# Allegro board COULOMETER_BOARD_V1.0.brd
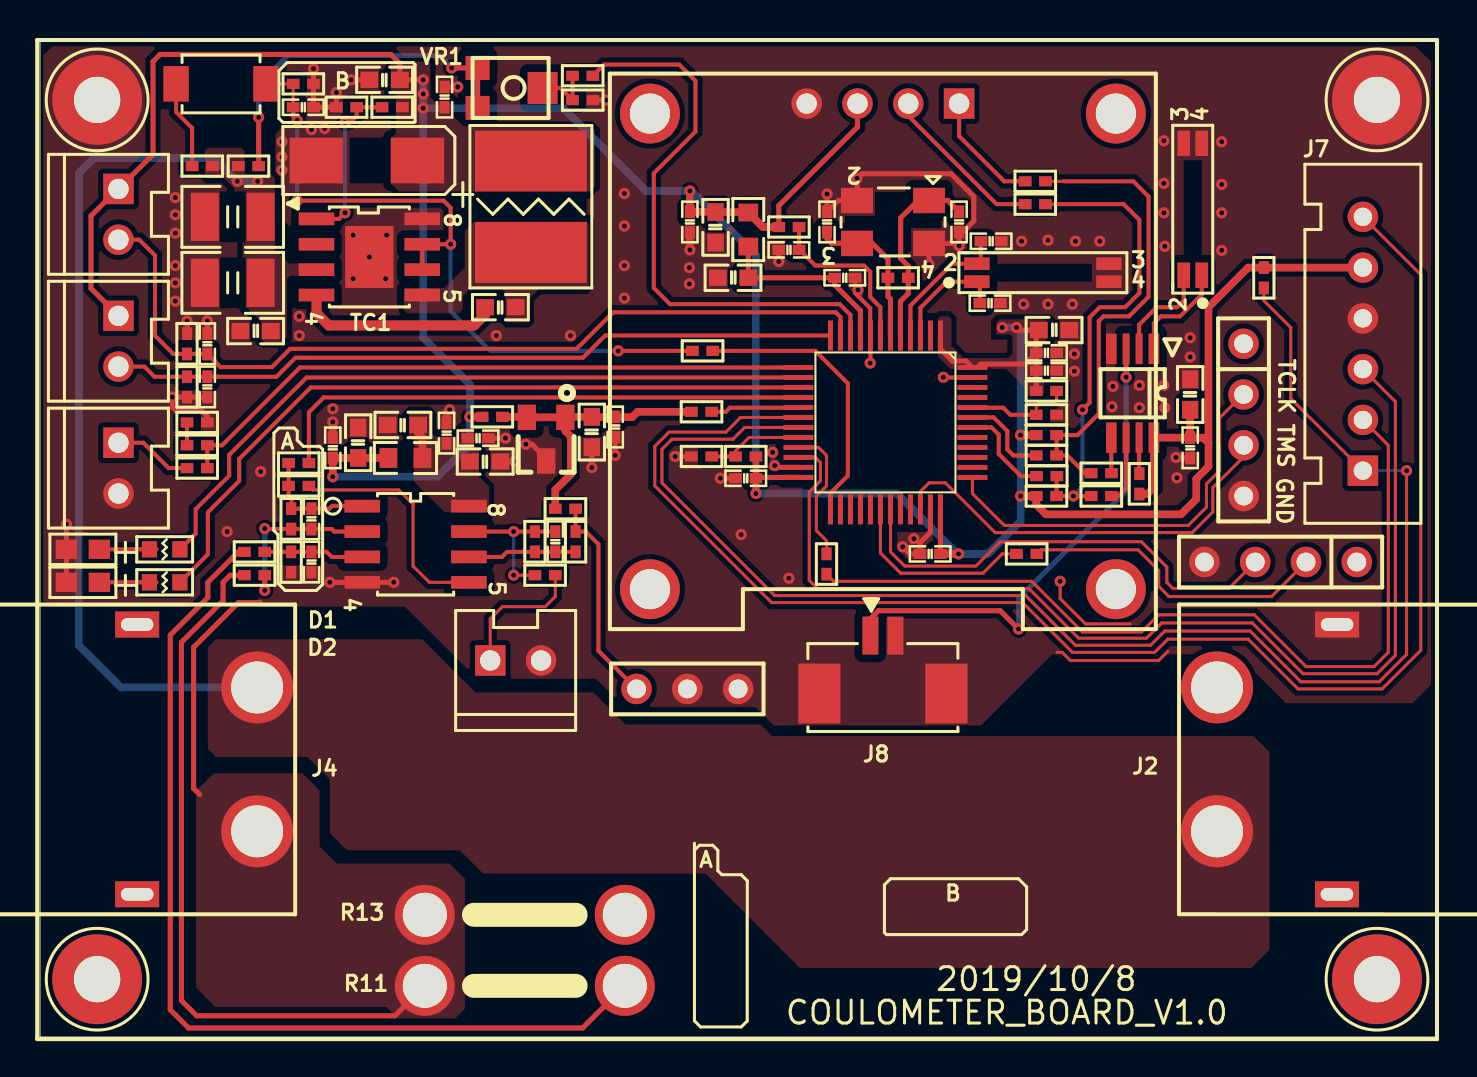
[diagram p0: board, top side]
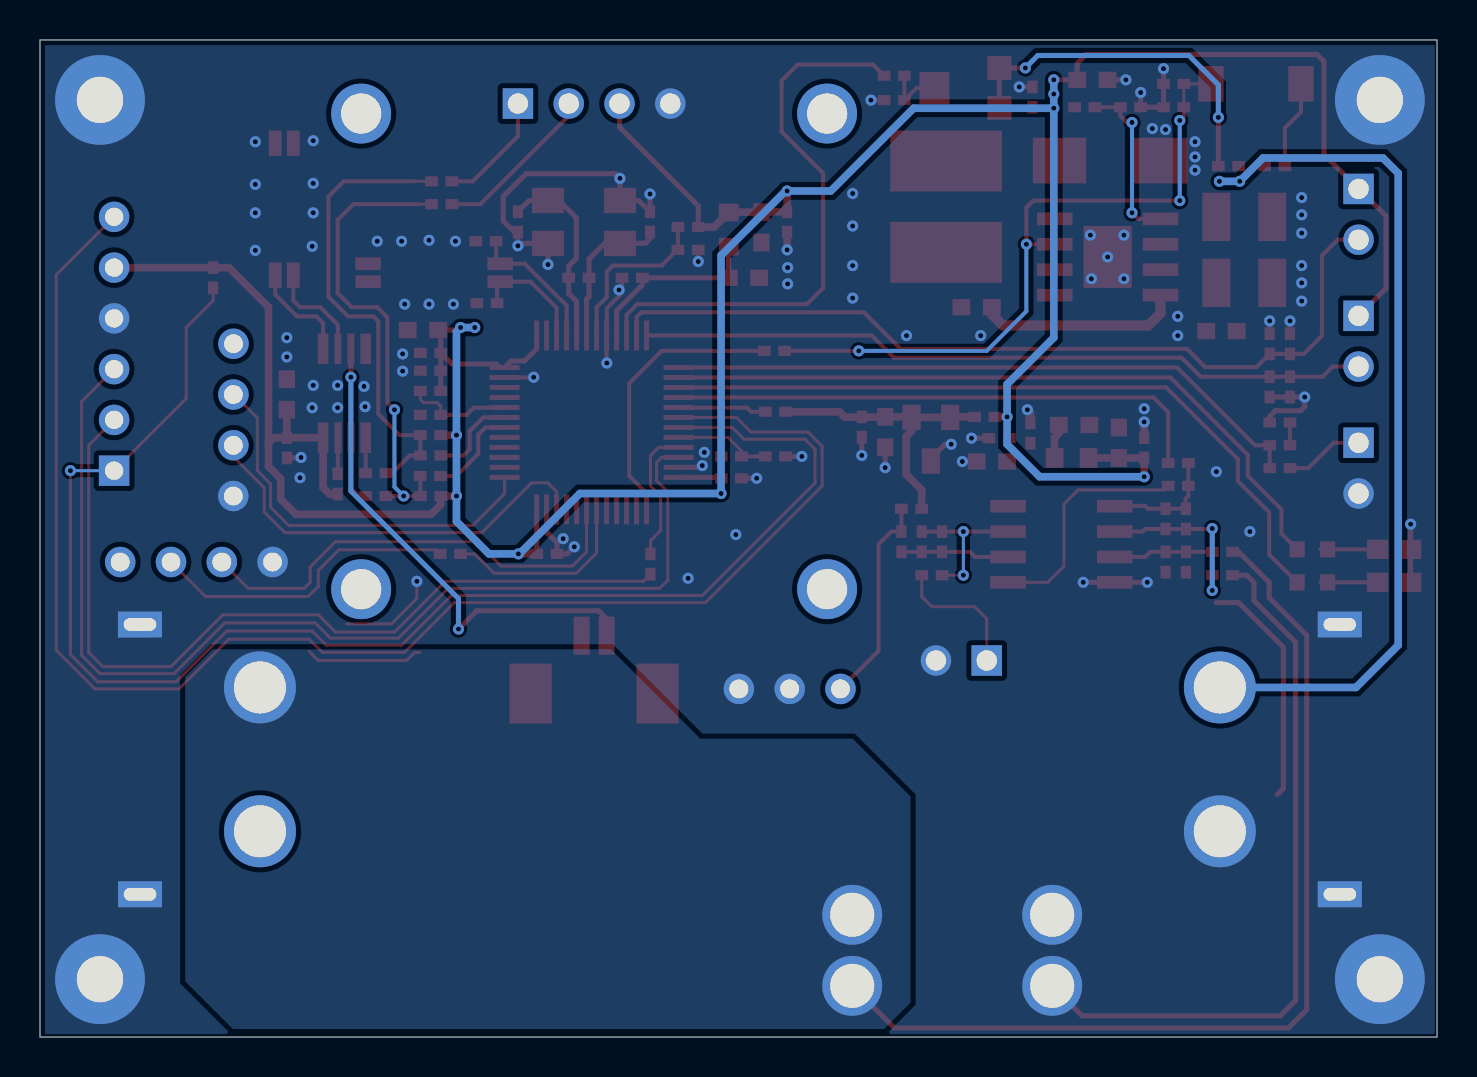
[diagram p1: board, bottom side, seen from below]

Outline 69.86 x 49.89 mm; copper layers: TOP, BOTTOM. Coordinates in mm from the lower left corner of the outline.
Outline path: 0,49.89 69.86,49.89 69.86,0 0,0 0,49.89

## Design rules (mm)
constraint set DEFAULT: min track width 0.152

## Placement (name value [footprint] x y rotation side)
C1  0.1uF/16V  [C0402]  37.45 39.39 180 top
C2  0.1uF/16V  [C0402]  28.76 30.53 90 top
C3  10uF/10V  [C0603]  27.6 30.27 270 top
C4  18pF/50V  [C0402]  39.36 40.79 270 top
C5  18pF/50V  [C0402]  45.96 40.79 90 top
C6  18pF/50V_NC  [C0402]  47.56 39.82 180 top
C7  18pF/50V_NC  [C0402]  47.51 36.72 180 top
C8  10uF/10V  [C0603]  22.26 28.8 0 top
C9  0.1uF/16V  [C0402]  21.91 29.97 0 top
C10  1nF/50V_NC  [C0402]  13.57 25.93 90 top
C11  0.1uF/16V  [C0402]  32.5 40.79 270 top
C12  10uF/10V  [C0603]  33.78 40.52 270 top
C13  0.1uF/16V  [C0402]  40.24 37.99 0 top
C14  10uF/10V  [C0603]  34.66 37.99 180 top
C15  10uF/10V  [C0603]  50.71 35.38 180 top
C16  0.1uF/16V  [C0402]  44.51 24.18 180 top
C17  0.1uF/16V  [C0402]  50.33 34.23 0 top
C18  0.1uF/16V  [C0402]  50.33 33.35 0 top
C19  0.1uF/16V  [C0402]  35.29 27.96 180 top
C20  1nF/50V_NC  [C0402]  25.77 24.79 90 top
C21  2.2uF/100V  [C1210]  9.64 41.04 0 top
C22  2.2uF/100V  [C1210]  9.64 37.74 0 top
C23  0.1uF/100V  [C0603]  10.78 35.33 180 top
C24  0.1uF/100V  [C0603]  23.02 36.52 0 top
C25  0.1uF/16V  [C0402]  14.64 29.49 90 top
C26  0.1uF/16V  [C0402]  20.33 30.22 90 top
C27  10uF/10V  [C0603]  15.91 29.74 270 top
C28  10uF/10V  [C0603]  17.23 47.9 0 top
C29  0.1uF/16V  [C0402]  20.23 47.04 90 top
C30  10uF/10V  [C0603]  18.15 30.63 0 top
C31  10uF/10V  [C0603]  57.52 32.15 270 top
C32  0.1uF/16V  [C0402]  57.52 29.49 270 top
C33  0.1uF/16V  [C0402]  8.37 34.69 90 top
C34  0.1uF/16V  [C0402]  8.37 32.53 270 top
C35  0.1uF/16V  [C0402]  13.17 46.53 0 top
C36  1nF/50V_NC  [C0402]  13.57 23.77 90 top
D1  Green  [D0603]  2.14 24.41 270 top
D2  Green  [D0603]  2.14 22.75 270 top
FB1  BLM18PG221SN1  [L0603]  35.42 40.41 270 top
FB2  BLM18PG221SN1  [L0603]  18.27 28.98 0 top
J1  SIP4-100_180D_NC  [SIP_4P_100_42]  60.18 34.69 270.1 top
J2  -  [XT60PW]  61.86 13.89 270 top
J3  SIP4-100_180D_NC  [SIP_4P_100_42]  65.85 23.77 180 top
J4  -  [XT60PW]  7.86 13.89 90 top
J5  SIP_2P_NC  [SIP2-100]  23.79 18.84 0 top
J7  SIP_6P  [SIP6-100]  66.15 28.34 90 top
J8  -  [SMT_2PIN_1_25MM_180]  42.15 20.09 0 top
J9  SIP_2P_NC  [SIP2-100]  3.92 28.47 270 top
J10  SIP_2P_NC  [SIP2-100]  3.92 41.17 270 top
J11  SIP_2P_NC  [SIP2-100]  3.92 34.82 270 top
L1  33uH/1A  [PL0707]  24.55 41.55 90 top
MH1  M2-3  [M2-3_4-5]  2.86 2.89 0 top
MH2  M2-3  [M2-3_4-5]  66.86 2.89 0 top
MH3  M2-3  [M2-3_4-5]  66.86 46.89 0 top
MH4  M2-3  [M2-3_4-5]  2.86 46.89 0 top
OLED1  -  [OLED_SIP4-100]  42.15 34.31 0 top
R1  1K_1%  [R0402]  50.33 31.14 0 top
R2  4.7K_5%  [R0402]  50.33 30.12 180 top
R3  4.7K_5%  [R0402]  50.33 27.07 180 top
R4  1K_1%_NC  [R0402]  50.33 32.33 180 top
R5  4.7K_5%  [R0402]  37.45 40.53 0 top
R6  1K_1%  [R0402]  22.62 31.03 0 top
R7  1K_1%_NC  [R0402]  35.29 29.05 0 top
R8  1K_1%  [R0402]  33.08 29.05 180 top
R9  1M_5%  [R0402]  42.91 37.99 180 top
R10  22R_5%  [R0402]  50.34 28.07 180 top
R11  5mR_1%  [R_2X10MM]  24.24 2.56 180 top
R12  22R_5%  [R0402]  50.33 29.1 0 top
R13  5mR_1%  [R_2X10MM]  24.24 6.12 180 top
R14  187K_1%  [R0402]  10.43 43.58 0 top
R15  1K_1%  [R0402]  10.73 24.28 180 top
R16  1K_1%  [R0402]  12.94 28.72 180 top
R17  1K_1%  [R0402]  12.94 27.58 180 top
R18  22R_5%  [R0402]  49.34 24.18 0 top
R19  10K_1%  [R0402]  12.56 25.93 270 top
R20  1K_1%  [R0402]  33.08 31.29 0 top
R21  1K_1%  [R0402]  27.14 48.1 0 top
R22  1K_1%  [R0402]  10.73 23.11 0 top
R23  10K_1%  [R0402]  27.14 46.88 0 top
R24  10K_1%  [R0402]  26.27 26.44 0 top
R25  1K_1%  [R0402]  25.26 23.11 180 top
R26  1K_1%  [R0402]  26.78 24.79 90 top
R27  330R_1%  [R0603]  6.23 24.41 0 top
R28  330R_1%  [R0603]  6.23 22.75 0 top
R29  22R_5%  [R0402]  39.33 23.67 270 top
R30  100K_1%  [R0402]  24.75 24.79 270 top
R31  100K_1%  [R0402]  8.11 43.58 180 top
R32  22R_5%  [R0402]  49.77 42.82 0 top
R33  22R_5%  [R0402]  49.77 41.68 0 top
R34  4.7K_5%  [R0402]  13.17 47.7 0 top
R35  154K_1%  [R0402]  17.61 46.53 0 top
R36  10K_1%  [R0402]  15.33 46.53 180 top
R37  10K_1%  [R0402]  54.98 27.68 270 top
R38  22R_5%  [R0402]  53.07 27.07 180 top
R39  22R_5%  [R0402]  53.07 28.22 180 top
R40  10K_1%  [R0402]  61.2 37.99 90 top
R41  1K_1%  [R0402]  7.86 29.61 180 top
R42  1K_1%  [R0402]  7.86 28.47 0 top
R43  1K_1%  [R0402]  7.86 30.76 0 top
R44  10K_1%  [R0402]  7.35 34.69 270 top
R45  10K_1%  [R0402]  7.35 32.53 90 top
R46  22R_5%  [R0402]  33.13 34.34 180 top
R47  10K_1%  [R0402]  12.56 23.77 270 top
SW1  -  [KEY-2-180]  9.05 47.7 180 top
TC1  100uF/10V  [SMD_C6-3]  16.34 43.86 180 top
U1  TL431ACDBZR  [SOT23-BEC]  25.31 29.92 180 top
U2  STM32F103C8T6  [LQFP48]  42.28 30.76 180 top
U3  LM358  [SOP8-50-150]  18.78 24.66 270 top
U4  MP9485  [HSOP-8-PAD]  16.47 39.04 270 top
U5  DS1339A  [SOP8-26-118]  55.61 34.44 180 top
VR1  10K_VR  [VR_3X3]  23.68 47.49 270 top
VR2  3590S-2_10K_NC  [SIP_3P_100_42]  29.83 17.42 0 top
Y1  8MHz  [X4-0503]  42.66 40.79 180 top
Y2  32.768KHZ  [XCOL-SMD]  50.15 38.25 0 top
Y3  32.768KHZ  [XCOL-SMD]  57.64 41.42 90 top

## Library data of the parts
C1 C11 C13 = CAP
C2 C9 C10 C20 C36 = CAP NP_8
C3 C8 C12 C14 C15 C21 C22 C27 C28 C30 C31 = 0_2.1uF Chip Cap
C4-C7 = CAP NP_3
C16-C19 C23-C26 C29 C32-C35 = CAP NP
D1 D2 = LED Green/TH
FB1 FB2 = FERRITE CHIP
J1 J3 = CONN PWR 4-R_0
J2 J4 = CONN PWR 4-R_3
J5 J9-J11 = SIP_1
J7 = SIP_0
J8 = SMT_2PIN_0-8MM
L1 = INDUCTOR_0
MH1-MH4 = M2-7
OLED1 = CONN PWR 4-R_5
R1 R4 R7 R8 R20 R21 VR1 VR2 = R_4
R2 R3 R5 R10-R17 R19 R22-R28 R30-R45 R47 = R_2
R6 R9 R18 R29 R46 = R
SW1 = KEY-2PIN_0
TC1 = CAP P_0
U1 = LED Green/TH_0
U2 = STM32F103C8T6
U3 = NE5532
U4 = TPS63700_2
U5 = DS1339_0
Y1 = CRYSTAL 4-PIN_1
Y2 Y3 = CRYSTAL_SMD3_0

## Footprints (pads in the part's own frame, mm; a bottom-side part is the same pattern mirrored in y, then rotated)
C0402
  rect 0.635x0.508 smd: 1(-0.508,0) 2(0.508,0)
C0603
  rect 0.889x0.813 smd: 1(-0.762,0) 2(0.762,0)
C1210
  rect 1.397x2.413 smd: 1(-1.397,0) 2(1.397,0)
D0603
  rect 0.965x1.067 smd: 1(0,0.826) 2(0,-0.826)
HSOP-8-PAD
  rect 0.635x1.778 smd: 1(-1.905,-2.644) 2(-0.635,-2.644) 3(0.635,-2.644) 4(1.905,-2.644) 5(1.905,2.644) 6(0.635,2.644) 7(-0.635,2.644) 8(-1.905,2.644)
  rect 3.099x2.413 smd: 9(0,0)
KEY-2-180
  rect 1.27x1.778 smd: 1(-2.25,0) 2(2.25,0)
L0603
  rect 0.889x0.991 smd: 1(-0.851,0) 2(0.851,0)
LQFP48
  rect 0.25x1.5 smd: 1(-2.75,-4.35) 2(-2.25,-4.35) 3(-1.75,-4.35) 4(-1.25,-4.35) 5(-0.75,-4.35) 6(-0.25,-4.35) 7(0.25,-4.35) 8(0.75,-4.35) 9(1.25,-4.35) 10(1.75,-4.35) 11(2.25,-4.35) 12(2.75,-4.35) 25(2.75,4.35) 26(2.25,4.35) 27(1.75,4.35) 28(1.25,4.35) 29(0.75,4.35) 30(0.25,4.35) 31(-0.25,4.35) 32(-0.75,4.35) 33(-1.25,4.35) 34(-1.75,4.35) 35(-2.25,4.35) 36(-2.75,4.35)
  rect 1.5x0.25 smd: 13(4.35,-2.75) 14(4.35,-2.25) 15(4.35,-1.75) 16(4.35,-1.25) 17(4.35,-0.75) 18(4.35,-0.25) 19(4.35,0.25) 20(4.35,0.75) 21(4.35,1.25) 22(4.35,1.75) 23(4.35,2.25) 24(4.35,2.75) 37(-4.35,2.75) 38(-4.35,2.25) 39(-4.35,1.75) 40(-4.35,1.25) 41(-4.35,0.75) 42(-4.35,0.25) 43(-4.35,-0.25) 44(-4.35,-0.75) 45(-4.35,-1.25) 46(-4.35,-1.75) 47(-4.35,-2.25) 48(-4.35,-2.75)
M2-3_4-5
  round 4.496 hole 2.311: 1(0,0)
OLED_SIP4-100
  round 2.997 hole 2.007: (-11.65,11.9) (-11.65,-11.9) (11.65,11.9) (11.65,-11.9)
  round 1.524 hole 1.016: 1(-3.81,12.4) 2(-1.27,12.4) 3(1.27,12.4)
  rect 1.524x1.524 hole 1.016: 4(3.81,12.4)
PL0707
  rect 3.048x5.588 smd: 1(-2.286,0) 2(2.286,0)
R0402
  rect 0.635x0.508 smd: 1(-0.508,0) 2(0.508,0)
R0603
  rect 0.762x0.813 smd: 1(-0.762,0) 2(0.762,0)
R_2X10MM
  round 3 hole 2.2: 1(-5,0) 2(5,0)
SIP2-100
  rect 1.524x1.524 hole 1.016: 1(-1.27,0)
  round 1.524 hole 1.016: 2(1.27,0)
SIP6-100
  rect 1.524x1.524 hole 0.914: 1(0,0)
  round 1.524 hole 0.914: 2(2.54,0) 3(5.08,0) 4(7.62,0) 5(10.16,0) 6(12.7,0)
SIP_3P_100_42
  round 1.524 hole 0.94: 1(0,0) 2(2.54,0) 3(5.08,0)
SIP_4P_100_42
  round 1.524 hole 0.94: 1(0,0) 2(2.54,0) 3(5.08,0) 4(7.62,0)
SMD_C6-3
  rect 2.667x2.286 smd: 1(-2.533,0) 2(2.533,0)
SMT_2PIN_1_25MM_180
  rect 0.8x1.9 smd: 1(-0.625,0) 2(0.625,0)
  rect 2.108x2.997 smd: 3(-3.175,-2.9) 4(3.175,-2.9)
SOP8-26-118
  rect 0.533x1.524 smd: 1(-0.09,0) 4(2.04,0) 5(2.04,4.445) 8(-0.09,4.445)
  rect 0.35x1.535 smd: 2(0.65,0) 3(1.3,0) 6(1.3,4.445) 7(0.65,4.445)
SOP8-50-150
  rect 0.635x1.778 smd: 1(-1.905,-2.667) 2(-0.635,-2.667) 3(0.635,-2.667) 4(1.905,-2.667) 5(1.905,2.667) 6(0.635,2.667) 7(-0.635,2.667) 8(-1.905,2.667)
SOT23-BEC
  rect 0.914x1.27 smd: 1(-0.965,-1.092) 2(0.965,-1.092) 3(0,1.092)
VR_3X3
  rect 1.2x1.2 smd: 1(-1,-1.8) 3(1,-1.8)
  rect 1.6x1.5 smd: 2(0,1.45)
X4-0503
  rect 1.6x1.27 smd: 1(-1.8,-1.075) 2(1.8,-1.075) 3(1.8,1.075) 4(-1.8,1.075)
XCOL-SMD
  rect 1.27x0.635 smd: 1(-3.3,-0.45) 2(-3.3,0.45) 3(3.3,0.45) 4(3.3,-0.45)
XT60PW
  round 3.6 hole 2.6: 1(3.6,-3) 2(-3.6,-3)
  rect 1.3x2.2 hole 0.635x1.626: 3(6.75,3) 4(-6.75,3)

## Nets
GND: C1.2 C2.1 C3.2 C4.1 C5.1 C6.1 C7.1 C8.2 C9.2 C11.2 C12.2 C13.2 C14.2 C15.1 C16.2 C17.2 C18.2 C19.2 C21.1 C22.1 C23.2 C25.2 C26.2 C27.1 C28.1 C29.2 C30.1 C31.1 C32.2 C33.2 C34.2 C35.2 C36.1 D1.2(C) D2.2(C) J1.4 J2.3 J2.4 J3.4 J4.2 J4.3 J4.4 J5.2 J7.4 J8.2 J8.3 J8.4 J9.2 MH1.1 MH2.1 MH3.1 MH4.1 OLED1.1 R1.2 R8.2 R11.2 R13.2 R22.1 R23.2 R34.2 R36.2 R43.2 R44.1 R45.1 R47.2 TC1.2 U1.3 U2.8 U2.23 U2.35 U2.47(VSS_3) U3.4 U4.8 U4.9 U5.4 VR2.2 VR2.3 Y1.2 Y1.4 Y2.3 Y2.4 Y3.3 Y3.4
VCC_3V3: C11.1 C12.1 C15.2 C16.1 C17.1 C18.1 C19.1 C25.1 C27.2 C28.2 C29.1 C31.2 C32.1 FB1.1 FB2.1 J7.5 J10.1 J11.1 L1.2 OLED1.2 R2.2 R3.2 R4.2 R5.1 R6.1 R7.2 R35.2 R37.2 R40.2 TC1.1 U2.1 U2.24 U2.36 U2.48 U5.8
VCC_3V3_A: C8.1 C9.1 C26.1 C30.2 FB2.2 U3.8
VCC_BAT: J8.1 U5.3
VCC_IN: C21.2 C22.2 C23.1 J2.1 J4.1 R14.1 R31.1 U4.3(VIN)
VCC_REF_2V5: C2.2 C3.1 R6.2 R20.1 R24.1 U1.1(REF) U1.2
VDDA_3V3: C13.1 C14.1 FB1.2 U2.9
ADC_CURRENT: R16.1 U2.16
ADC_VOLTAGE: R21.2 U2.10
ARM_RESET: C1.1 R5.2 U2.7
BOOT0: R1.1 R4.1 U2.44
BOOT1: R7.1 R8.1 U2.20
BT_EN: J7.6 U2.18
BT_STATE: J7.1 R40.1 U2.19
BT_UART_RXD: J7.3 U2.22
BT_UART_TXD: J7.2 R29.2
CURRENT_CMP+: R17.1 U3.5
CURRENT_CMP-: R24.2 R26.2 VR2.1
CURRENT_CMP_CTL: J5.1 R25.1
HALL_IN: R41.1 R42.2 U2.13
NTC_1: C33.1 J10.2 R44.2 U2.11
NTC_2: C34.1 J11.2 R45.2 U2.12
RTC_OSC_IN: C7.2 U2.3 Y2.1
RTC_OSC_OUT: C6.2 U2.4 Y2.2
SAMPLE_CURRENT: J2.2 R11.1 R13.1 R15.2
STM32_IIC_SCL: R3.1 R10.1 R33.2 R38.2
STM32_IIC_SDA: R2.1 R12.2 R32.2 R39.2
STM32_RXD: J3.3 U2.31
STM32_TXD: J3.2 R18.2
SWCLK: J1.2 U2.37
SWIO: J1.3 U2.34
SYS_OSC_IN: C5.2 R9.1 U2.5 Y1.1(Y1)
SYS_OSC_OUT: C4.2 R9.2 U2.6 Y1.3
SYS_POWER_EN: C35.1 R34.1 R46.2 SW1.1 U4.6 U4.7
N17131428: U5.2(X2) Y3.2
N17131432: U5.1 Y3.1
N17131490: R37.1 U5.7
N17131504: R38.1 U5.6
N17131527: R39.1 U5.5
N17136061: R14.2 VR1.1 VR1.3
N17136078: R21.1 R23.1 VR1.2
N17137389: R18.1 U2.30
N17138113: R10.2 U2.42
N17138116: R12.1 U2.43
N17142406: C10.1 R19.2 R22.2 U3.2
N17142410: C10.2 R16.2 R17.2 R19.1 U3.1
N17142414: C20.1 R26.1 R30.2 U3.6
N17142418: C20.2 R25.2 R30.1 U3.7(OUT)
N17142509: C36.2 R15.1 R47.1 U3.3
N17151431: R29.1 U2.21
N17161102: C24.1 U4.4
N17161105: C24.2 L1.1 U4.5
N17161686: R35.1 R36.1 U4.1
N17168849: D1.1 R27.1
N17168859: D2.1 R28.1
N17169618: R27.2 U2.14
N17169623: R28.2 U2.15
N17176733: J9.1 R42.1
N17176975: R41.2 R43.1
N17184587: R46.1 U2.25
N17186713: R31.2 SW1.2
N17198791: OLED1.3 R33.1
N17198794: OLED1.4 R32.1
N17203867: R20.2 U2.17

Pads without a net: J1 1; J3 1; U2 2 26 27 28 29 32 33 38 39 40 41 45 46; U4 2

## Via types
v1: diameter 0.559, hole 0.254, TOP to BOTTOM, 123 vias

## Routing (per net, layer and track width the routed paths; a pad name or vN(x,y) marks a point on that pad's centre or on a via; arc(x,y) is an arc through that point)
GND: length 113.2
  TOP w0.152: 56.4,19.3 55.94,18.84 51.52,18.84 51.12,19.25 50.86,19.25 ; 54.52,20.67 52.28,20.67 51.01,21.94 v1(51.01,22.8)
  TOP w0.203: U2.47 45.18,33 v1(45.17,33.02) ; C13.2 40.75,37.23 41.51,36.47 41.51,35.12 U2.8 41.53,33.74 v1(41.51,33.73)
  TOP w0.254: v1(39.36,42.19) C4.1 39.92,41.86 Y1.2 v1(40.86,42.97) 41.09,43.2 45.55,43.2 46.7,42.06 46.7,40.84 46.14,40.28 C5.1 v1(45.96,39.59) 45.84,39.71 Y1.4 v1(44.46,38.66) ; v1(24.29,29.66) 24.6,29.66 25.31,28.95 U1.3 ; C19.2 v1(34.02,27.96) ; v1(14.49,22.75) U3.4 v1(17.69,22.75) ; C2.1 v1(28.76,29.1) ; v1(14.82,47.27) R36.2 C35.2 R34.2 v1(13.68,48.46) ; 11.03,21.74 9.92,21.74 7.68,19.5 7.68,12.44 7.99,12.14 ; C34.2 R45.1 v1(6.62,32.03) 6.62,31.54 6.82,31.34 8.09,31.34 8.37,31.06 R43.2 ; v1(43.14,24.53) 43.5,24.18 C16.2 44,24.74 44.53,25.26 U2.35 ; C3.2 v1(27.6,28.49) ; C29.2 v1(20.89,47.54) ; R44.1 v1(7.35,35.84) ; C28.1 v1(15.56,47.9) ; v1(36.74,28.6) 36.83,28.51 U2.23 ; C8.2 v1(23.73,28.8) ; v1(1.32,25.66) D1.2 D2.2 ; C33.2 v1(8.37,35.84) ; C1.2 v1(36.94,38.81) ; C32.2 56.83,28.98 v1(56.81,29) ; R11.2 17.74,1.06 7.83,1.06 7.07,1.82 7.07,19.76 9.16,21.84 9.16,22.75 9.51,23.11 R22.1 ; R8.2 v1(31.76,29.05) ; R23.2 v1(28.31,46.88) ; C9.2 v1(23.28,29.97)
  TOP w0.381: C11.2 v1(32.5,39.39) ; v1(20.48,31.39) 20.33,31.24 C26.2 ; C25.2 v1(14.64,30.78)
  vias: v1(6.77,42.01) v1(6.77,41.14) v1(6.77,40.23) v1(6.77,38.6) v1(6.77,37.74) v1(6.77,36.83) v1(9.36,25.29) v1(11.03,28.29) v1(12.1,44.8) v1(12.1,44.04) v1(12.1,43.38) v1(12.97,36.06) v1(12.97,35.1) v1(13.57,45.41) v1(14.24,45.46) v1(14.64,31.44) v1(15.66,40.13) v1(15.66,37.94) v1(16.47,39.04) v1(17.28,37.94) v1(17.33,40.13) v1(22.82,35.1) v1(26.53,35.1) v1(29.22,42.21) v1(29.22,40.58) v1(29.22,38.6) v1(29.22,36.98) v1(32.47,38.5) v1(32.47,37.69) v1(35.06,25.14) v1(36.64,29.26) v1(37.45,22.96) v1(40.91,37.38) v1(43.7,24.94) v1(49.08,39.82) v1(49.19,36.67) v1(50.4,39.87) v1(50.4,36.67) v1(51.62,36.67) v1(51.78,39.82) v1(51.73,34.18) v1(51.73,33.32) v1(53,39.82) v1(53.61,31.54) v1(53.66,32.56) v1(54.98,32.61) v1(54.98,31.49) v1(56.2,44.85) v1(56.2,42.72) v1(56.2,41.25) v1(56.2,32.61) v1(56.25,39.57) v1(56.25,31.49) v1(56.86,27.99) v1(57.52,35) v1(57.52,34.03) v1(59.09,44.8) v1(59.09,42.67) v1(59.09,41.25) v1(59.09,39.37)
VCC_3V3: length 185.3
  TOP w0.254: C19.1 35.84,28 U2.24 ; C19.1 v1(35.8,27.2) ; C19.1 R7.2 ; C17.1 49.26,33.68 47.05,33.68 46.88,33.51 U2.48 46.3,33.83 45.63,33.83 45.03,34.43 U2.1 ; C17.1 49.82,35.25 C15.2 48.96,35.38 v1(48.83,35.5) ; C17.1 C18.1 R4.2 ; J11.1 2.55,37.46 2.55,41.09 3.9,42.44 J10.1 5.65,44.17 5.65,48.81 6.01,49.17 17.54,49.17 17.99,48.71 C28.2 v1(19.16,47.9) ; U2.36 45.03,24.18 C16.1 ; R5.1 36.94,41.6 40.88,45.54 OLED1.2
  TOP w0.381: C32.1 55.7,29.99 55.7,27.49 55.38,27.17 R37.2 ; C32.1 58.16,29.99 58.43,29.72 ; C32.1 C31.2 ; v1(49.03,27.07) R3.2 49.82,26.64 50.3,26.16 57.06,26.16 57.82,26.92 57.82,27.94 58.43,28.55 58.43,29.72 ; FB2.1 C27.2 C25.1 v1(14.64,28.04) ; v1(32.5,42.34) C11.1 33.76,41.3 C12.1 35.4,41.28 FB1.1 36.14,40.53 R5.1 ; 58.43,29.72 58.43,36.52 60.41,38.5 R40.2 J7.5 ; v1(45.93,24.18) C16.1 ; R2.2 v1(49.03,30.12) ; R6.1 v1(21.5,31.03)
  BOTTOM w0.381: v1(14.64,28.04) 19.87,28.04 21.5,29.66 v1(21.5,31.03) 21.5,32.66 19.16,35 v1(19.16,46.48) ; v1(19.16,46.48) 26.17,46.48 30.31,42.34 v1(32.5,42.34) 32.57,42.34 35.8,39.11 v1(35.8,27.2) 42.86,27.2 45.88,24.18 v1(45.93,24.18) 47.41,24.18 49.03,25.8 v1(49.03,27.07) v1(49.03,30.12) 49.03,35.3 v1(48.83,35.5) v1(48.12,35.5) ; v1(19.16,46.48) v1(19.16,47.19) v1(19.16,47.9)
VCC_3V3_A: length 1.7
  TOP w0.381: C30.2 18.91,30.22 19.12,30.01 FB2.2
VCC_BAT: length 25
  TOP w0.254: J8.1 41.52,20.94 41.92,21.33 48.02,21.33 v1(48.93,20.42) ; U5.3 v1(54.31,33.02)
  BOTTOM w0.254: v1(48.93,20.42) 48.93,21.94 54.31,27.32 v1(54.31,33.02)
VCC_IN: length 43.2
  BOTTOM w0.381: v1(10.88,42.82) v1(9.87,42.82) 8.7,43.99 2.7,43.99 1.94,43.23 1.94,19.6 4.05,17.49 J4.1
VCC_REF_2V5: length 14.6
  TOP w0.381: R24.1 25.77,27.38 26.54,28.15 26.54,30.05 26.27,30.32 U1.1 ; R20.1 29.88,31.29 29.61,31.02 28.78,31.02 ; C2.2 28.78,31.02 ; 28.78,31.02 27.61,31.02 C3.1 26.3,31.03 U1.1 ; U1.1 U1.2 24.32,31.03 R6.2
VDDA_3V3: length 9.3
  TOP w0.254: FB1.2 C14.1 C13.1 39.74,37.64 41.03,36.35 U2.9
ADC_CURRENT: length 27.3
  TOP w0.203: U2.16 14.18,32 13.45,31.27 R16.1
ADC_VOLTAGE: length 28.3
  TOP w0.203: U2.10 40.53,36.14 39.99,36.67 31.51,36.67 30.69,37.49 30.69,43.23 32.78,45.31 32.78,47.85 31.96,48.66 28.21,48.66 R21.2
ARM_RESET: length 8.6
  TOP w0.203: U2.7 42.02,35.11 42.02,36.52 41.51,37.03 41.51,38.3 41.21,38.6 38.77,38.6 37.98,39.39 C1.1 R5.2
BOOT0: length 5.4
  TOP w0.152: R1.1 49.82,31.57 50,31.75 50.68,31.75 50.84,31.9 R4.1
  TOP w0.203: R1.1 48.53,31.14 48.17,31.49 46.64,31.49 U2.44
BOOT1: length 4.9
  TOP w0.152: R7.1 34.78,29.33 35.46,30 U2.20
  TOP w0.203: R8.1 R7.1
BT_EN: length 76.5
  TOP w0.152: U2.18 35.03,31 34.3,30.27 31.46,30.27 30.75,29.56 30.75,27.58 36.59,21.74 49.14,21.74 51.63,19.25 55.74,19.25 56.4,19.91 60.42,19.91 62.91,17.42 67.11,17.42 69.05,19.36 69.05,38.15 J7.6
BT_STATE: length 74.1
  TOP w0.152: J7.1 62.55,31.95 62.55,35.5 61.2,36.85 R40.1 ; U2.19 35.24,30.51 34.65,29.92 31.6,29.92 31.1,29.41 31.1,27.73 36.73,22.09 49.29,22.09 51.78,19.6 55.54,19.6 56.25,20.32 60.51,20.32 63.05,17.78 66.97,17.78 68.34,19.15 v1(68.34,28.34)
  BOTTOM w0.152: J7.1 v1(68.34,28.34)
BT_UART_RXD: length 54.6
  TOP w0.152: J7.3 67.78,31.8 67.78,19.1 66.86,18.18 63.16,18.18 60.62,20.72 56.09,20.72 55.33,19.96 51.93,19.96 49.44,22.45 38.87,22.45 38.47,22.86 38.47,27.28 39.03,27.83 39.03,28.75 38.77,29 U2.22
BT_UART_TXD: length 43.2
  TOP w0.152: R29.2 39.69,22.8 49.59,22.8 52.13,20.26 55.08,20.26 55.94,21.13 60.72,21.13 63.31,18.54 66.71,18.54 67.42,19.25 67.42,29.61 J7.2
CURRENT_CMP+: length 11.8
  TOP w0.152: U3.5 19.47,22.75 18.65,23.57 18.65,26.67 17.94,27.38 13.65,27.38 R17.1
CURRENT_CMP-: length 10.6
  TOP w0.203: VR2.1 27.93,19.33 27.93,24.66 27.29,25.29 R26.2 R24.2
CURRENT_CMP_CTL: length 6.9
  TOP w0.152: J5.1 22.52,20.93 23.13,21.53 25.26,21.53 25.77,22.04 R25.1
HALL_IN: length 32.3
  TOP w0.203: R42.2 R41.1 9.1,29.61 13,33.51 U2.13
NTC_1: length 43.3
  TOP w0.203: J10.2 4.96,39.9 5.75,39.11 5.75,35.1 6.67,34.18 R44.2 C33.1 9.03,33.52 11.59,33.52 12.51,34.44 26.83,34.44 28.66,36.27 39.79,36.27 40.03,36.03 U2.11
NTC_2: length 36.7
  TOP w0.203: U2.12 28.26,35.11 27.15,34 12.78,34 11.82,33.04 C34.1 R45.2 5.73,33.04 5.22,33.55 3.92,33.55
RTC_OSC_IN: length 5.9
  TOP w0.203: U2.3 44.03,36.49 45.33,37.8 Y2.1 47,37.65 C7.2
RTC_OSC_OUT: length 6.9
  TOP w0.152: Y2.2 46.89,38.7
  TOP w0.203: U2.4 43.53,36.6 45.62,38.7 Y2.2 47.05,38.9 C6.2
SAMPLE_CURRENT: length 48.6
  TOP w0.254: 29.24,2.56 27.13,0.45 7.43,0.45 6.51,1.37 6.51,20.11 8.39,21.99 8.39,22.75 9.92,24.28 R15.2
STM32_IIC_SCL: length 23.7
  TOP w0.152: 50.94,41.68 R33.2
  TOP w0.203: v1(52.13,31.39) 52.49,31.75 52.49,36.01 53,36.52 54.27,36.52 54.98,37.23 54.98,40.89 54.19,41.68 50.94,41.68 ; R38.2 v1(51.67,27.07) R3.1 50.84,28.06 R10.1
  BOTTOM w0.203: v1(51.67,27.07) 52.13,27.53 v1(52.13,31.39)
STM32_IIC_SDA: length 23.8
  TOP w0.152: 51.17,42.82 R32.2
  TOP w0.203: 51.17,42.82 54.67,42.82 55.43,42.06 55.43,37.04 54.46,36.06 53.19,36.06 52.94,35.82 52.94,31.19 51.88,30.12 R2.1 R12.2 51.37,29.1 52.26,28.22 R39.2
STM32_RXD: length 23.1
  TOP w0.152: J3.3 59.45,22.45 56.65,22.45 56.35,22.75 56.35,23.52 55.08,24.79 48.02,24.79 46.8,23.57 43.24,23.57 42.53,24.28 42.53,26.4 U2.31
STM32_TXD: length 15.7
  TOP w0.152: R18.2 50.05,24.38 54.91,24.38 55.94,23.35 55.94,22.55 56.45,22.04 61.58,22.04 J3.2
SWCLK: length 20
  TOP w0.152: U2.37 46.63,27.19 48.22,25.6 57.42,25.6 58.33,26.51 58.33,27.68 58.99,28.34 58.99,30.98 60.16,32.15 J1.2
SWIO: length 21.1
  TOP w0.152: J1.3 60.19,29.03 58.65,27.49 58.65,26.27 57.62,25.24 47.76,25.24 45.27,27.73 44.46,27.73 44.03,27.3 U2.34
SYS_OSC_IN: length 9.7
  TOP w0.254: C5.2 45.39,41.86 Y1.1 43.91,41.86 43.04,40.99 43.04,38.96 43.42,38.58 R9.1 43.42,37.21 43.03,36.81 U2.5
SYS_OSC_OUT: length 7.7
  TOP w0.254: C4.2 39.36,39.95 39.58,39.72 40.85,39.72 Y1.3 41.62,39.71 42.4,38.93 R9.2 42.4,37.05 42.53,36.93 U2.6
SYS_POWER_EN: length 35.9
  TOP w0.152: SW1.1 R34.1 C35.1
  TOP w0.203: C35.1 12.66,46.07 v1(12.86,45.87) ; R46.2 v1(28.92,34.34) ; v1(12.86,41.85) 20.18,41.85 20.53,41.5 v1(20.53,39.67) U4.7 U4.6
  BOTTOM w0.203: v1(12.86,41.85) v1(12.86,45.87) ; v1(20.53,39.67) 20.53,36.32 22.52,34.34 v1(28.92,34.34)
N17131428: length 5.2
  TOP w0.203: U5.2 54.96,35.64 55.84,36.52 56.86,36.52 57.19,36.86 Y3.2
N17131432: length 5.2
  TOP w0.203: Y3.1 58.09,37.15 57.01,36.06 56.04,36.06 55.7,35.72 U5.1
N17131490: length 1.8
  TOP w0.203: 54.96,29.99 54.96,28.2 R37.1
N17131504: length 3.4
  TOP w0.203: 54.31,29.99 54.31,27.47 53.91,27.07 R38.1
N17131527: length 1.8
  TOP w0.203: R39.1 53.57,28.22 53.57,29.99
N17136061: length 17.9
  TOP w0.254: VR1.3 VR1.1 v1(20.59,48.49) ; R14.2 v1(10.93,46.02)
  BOTTOM w0.254: v1(20.59,48.49) 19.96,49.12 12.41,49.12 10.93,47.65 v1(10.93,46.02)
N17136078: length 3
  TOP w0.203: VR1.2 26.02,47.49 R23.1 R21.1
N17137389: length 9.8
  TOP w0.152: R18.1 48.12,24.18 47.15,23.21 43.04,23.21 42.03,24.22 U2.30
N17138113: length 4.8
  TOP w0.203: R10.2 49.05,28.07 47.94,29.18 47.94,30.15 47.58,30.51 U2.42
N17138116: length 4.5
  TOP w0.203: U2.43 47.69,31 48.37,30.32 48.37,29.41 48.68,29.1 R12.1
N17142406: length 8.8
  TOP w0.203: v1(11.24,25.45) 11.26,25.42 R19.2 C10.1 14.59,25.42 14.72,25.29 U3.2
  TOP w0.254: R22.2 v1(11.24,22.35)
  BOTTOM w0.254: v1(11.24,22.35) v1(11.24,25.45)
N17142410: length 6
  TOP w0.203: U3.1 16.1,26.58 14.61,26.58 14.46,26.44 C10.2 R19.1 12.58,26.45 12.58,26.93 12.43,27.07 R17.2 R16.2
N17142414: length 5.4
  TOP w0.203: R26.1 C20.1 R30.2 23.35,24.28 23.1,24.02 U3.6
N17142418: length 7.6
  TOP w0.152: v1(23.68,23.11) R25.2
  TOP w0.203: C20.2 R30.1 v1(23.68,25.29) U3.7
  BOTTOM w0.152: v1(23.68,25.29) v1(23.68,23.11)
N17142509: length 5
  TOP w0.203: U3.3 14.59,24.02 14.34,24.28 C36.2 R47.1 R15.1
N17151431: length 6.9
  TOP w0.152: U2.21 38.93,29.51 39.33,29.1 39.33,27.58 38.82,27.07 38.82,25.34 39.33,24.84 R29.1
N17161102: length 10.2
  TOP w0.508: C24.1 22.26,36.17 21.7,35.61 14.44,35.61 13.83,36.22 13.83,37.13 U4.4
N17161686: length 8.5
  TOP w0.203: R35.1 R36.1 15.84,46.1 15.51,45.77 v1(15.25,45.77) ; v1(15.25,41.25) 14.95,40.94 U4.1
  BOTTOM w0.203: v1(15.25,45.77) v1(15.25,41.25)
N17168849: length 2.9
  TOP w0.203: D1.1 R27.1 5.83,24.41
N17168859: length 2.9
  TOP w0.203: D2.1 R28.1 5.83,22.75
N17169618: length 35.8
  TOP w0.203: U2.14 13.33,33 9.46,29.13 9.46,28.09 7.78,26.41 7.78,25.19 R27.2
N17169623: length 36.8
  TOP w0.203: U2.15 13.54,32.51 9.96,28.93 9.96,27.83 8.39,26.26 8.39,24.15 R28.2
N17176733: length 4
  TOP w0.203: J9.1 5.17,29.74 6.44,28.47 R42.1
N17176975: length 1.1
  TOP w0.203: R41.2 R43.1
N17184587: length 14.1
  TOP w0.203: R46.1 38.77,34.34 40.4,32.71 40.4,28.09 39.53,27.22 U2.25
N17186713: length 4.4
  TOP w0.203: R31.2 7.61,45.49 6.8,46.29 SW1.2
N17198791: length 8.3
  TOP w0.203: R33.1 47.84,41.68 43.42,46.1 OLED1.3
N17198794: length 5.9
  TOP w0.203: OLED1.4 45.96,45.08 48.22,42.82 R32.1
N17203867: length 4.4
  TOP w0.203: R20.2 34.3,31.29 34.5,31.49 37.91,31.49 U2.17

## Copper pours and planes (outline as drawn; the poured copper is in the pictures)
GND on TOP: 32.12,40.64 32.88,40.64 33.29,40.23 34.3,40.23 34.56,39.98 34.56,37.49 34.2,37.13 32.17,37.13 31.91,37.38 31.91,40.43
GND on TOP: 10.37,34.9 6.92,34.9 6.46,35.35 6.46,42.31 6.72,42.57 8.65,42.57 8.95,42.26 8.95,36.47 9.46,35.96 10.32,35.96 10.48,35.81 10.48,35
GND on TOP: 8.7,13.2 13.12,13.2 13.98,12.34 13.98,9.55 14.84,8.68 20.48,8.68 21.25,7.92 21.25,1.42 20.76,0.94 17.89,0.94 17.32,1.51 8.76,1.51 7.81,2.46 7.81,12.31
GND on TOP: 0.16,21.84 0.16,49.12 0.62,49.58 68.79,49.58 69.56,48.81 69.56,17.62 68.64,16.71 62.29,16.71 59.85,19.15 50.61,19.15 47.05,15.59 36.69,15.59 35.77,16.51 29.22,16.51 27.8,17.93 21.86,17.93 18.25,21.53 10.88,21.53 10.88,23.16 10.48,23.57 9.61,23.57 7.58,21.53 0.47,21.53 ; 20 cut-outs
GND on TOP: 14.29,29.66 15.1,29.66 15.45,30.02 17.69,30.02 17.94,30.27 17.94,31.14 17.33,31.75 14.49,31.75 14.08,31.34 14.08,29.87
GND on BOTTOM: 0.11,49.64 69.6,49.64 69.6,0.15 0.11,0.15
VCC_3V3 on TOP: 17.54,48.66 17.54,47.39 17.79,47.14 17.79,45.21 17.54,44.95 17.54,42.72 17.94,42.31 27.49,42.31 27.75,42.57 27.75,45.36 27.54,45.56 21.19,45.56 20.48,46.27 20.48,46.78 20.43,46.83 19.72,46.83 19.52,47.04 19.52,48.71 19.42,48.81 17.69,48.81
VCC_3V3 on TOP: 45.53,33.42 48.32,33.42 49.24,32.51 49.24,32.2 49.34,32.1 50.1,32.1 50.2,32.2 50.2,34.79 50.4,35 50.4,35.76 50.25,35.91 47.97,35.91 47.81,35.76 47.81,35.15 48.53,35.15 48.63,35.05 48.63,34.18 48.42,33.98 46.19,33.98 45.58,34.59 45.58,35.91 45.43,36.06 45.02,36.06 44.92,35.96 44.92,34.03
VCC_3V3_A on TOP: 18.45,31.19 18.45,30.07 18.71,29.82 18.71,27.78 20.23,26.26 22.36,26.26 22.46,26.36 22.46,27.53 21.96,28.04 21.96,29.41 21.7,29.66 21.7,30.37 21.6,30.48 21.09,30.48 20.99,30.37 20.99,30.22 20.84,30.07 19.72,30.07 19.57,30.22 19.57,31.14 19.42,31.29 18.55,31.29
VCC_IN on TOP: 10.22,44.34 10.22,43.28 10.37,43.12 11.59,43.12 11.75,42.97 11.75,39.42 12.46,38.71 14.59,38.71 14.64,38.65 14.64,38.2 14.54,38.1 12.51,38.1 12.36,37.94 12.36,35.05 12.05,34.74 11.24,34.74 11.03,34.95 11.03,35.81 10.32,36.52 10.22,36.52 10.12,36.62 10.12,41.65 9.71,42.06 9.71,42.46 9.21,42.97 8.39,42.97 8.24,43.12 8.24,44.34 8.39,44.5 10.07,44.5
VCC_IN on TOP: 8.8,19.91 19.11,19.91 21.78,17.24 27.67,17.24 29.27,15.64 36.03,15.64 36.61,15.06 60.69,15.06 61.48,14.27 61.48,4.36 60.56,3.45 38.01,3.45 33.29,8.17 22.16,8.17 20.99,9.34 15.35,9.34 14.49,10.21 14.49,12.9 13.37,14.02 8.8,14.02 8.39,14.42 8.39,19.5
SAMPLE_CURRENT on BOTTOM: 61.23,19.4 41.31,19.4 36.84,14.93 29.22,14.93 26.33,12.04 26.33,1.72 27.65,0.4 60.21,0.4 62.6,2.79 62.6,18.03
N17161105 on TOP: 18.25,37.49 20.23,37.49 21.25,38.5 21.25,40.33 21.7,40.79 27.34,40.79 27.44,40.69 27.44,37.59 27.29,37.44 24.95,37.44 24.45,36.93 24.45,35.86 24.34,35.76 23.38,35.76 23.23,35.91 23.23,37.28 23.07,37.44 21.5,37.44 21.14,37.08 21.14,36.42 20.94,36.22 18.35,36.22 18.2,36.37 18.2,37.44

## Text on the board
Ref Des/Silkscreen Top: A | B | GND | TMS | TCLK | COULOMETER_BOARD_V1.0 | 2019/10/8
NCLEGEND-1-2: FIGURE | FINISHED_SIZE | 10.0 | 36.0 | 37.012 | 40.0 | 79.0 | 86.61 | 91.0 | 102.358 | 64.0x25.0 | ROTATION | - | 179.000 | 0.000 | DRILL CHART: TOP to BOTTOM | ALL UNITS ARE IN MILS | TOLERANCE_DRILL | +10.0/-0.0 | +0.0/-0.0 | +3.0/-3.0 | PLATED | QTY | 123 | 6 | 11 | 4 | 8 | 2
